# Allegro board BINARYCOUNTER.brd
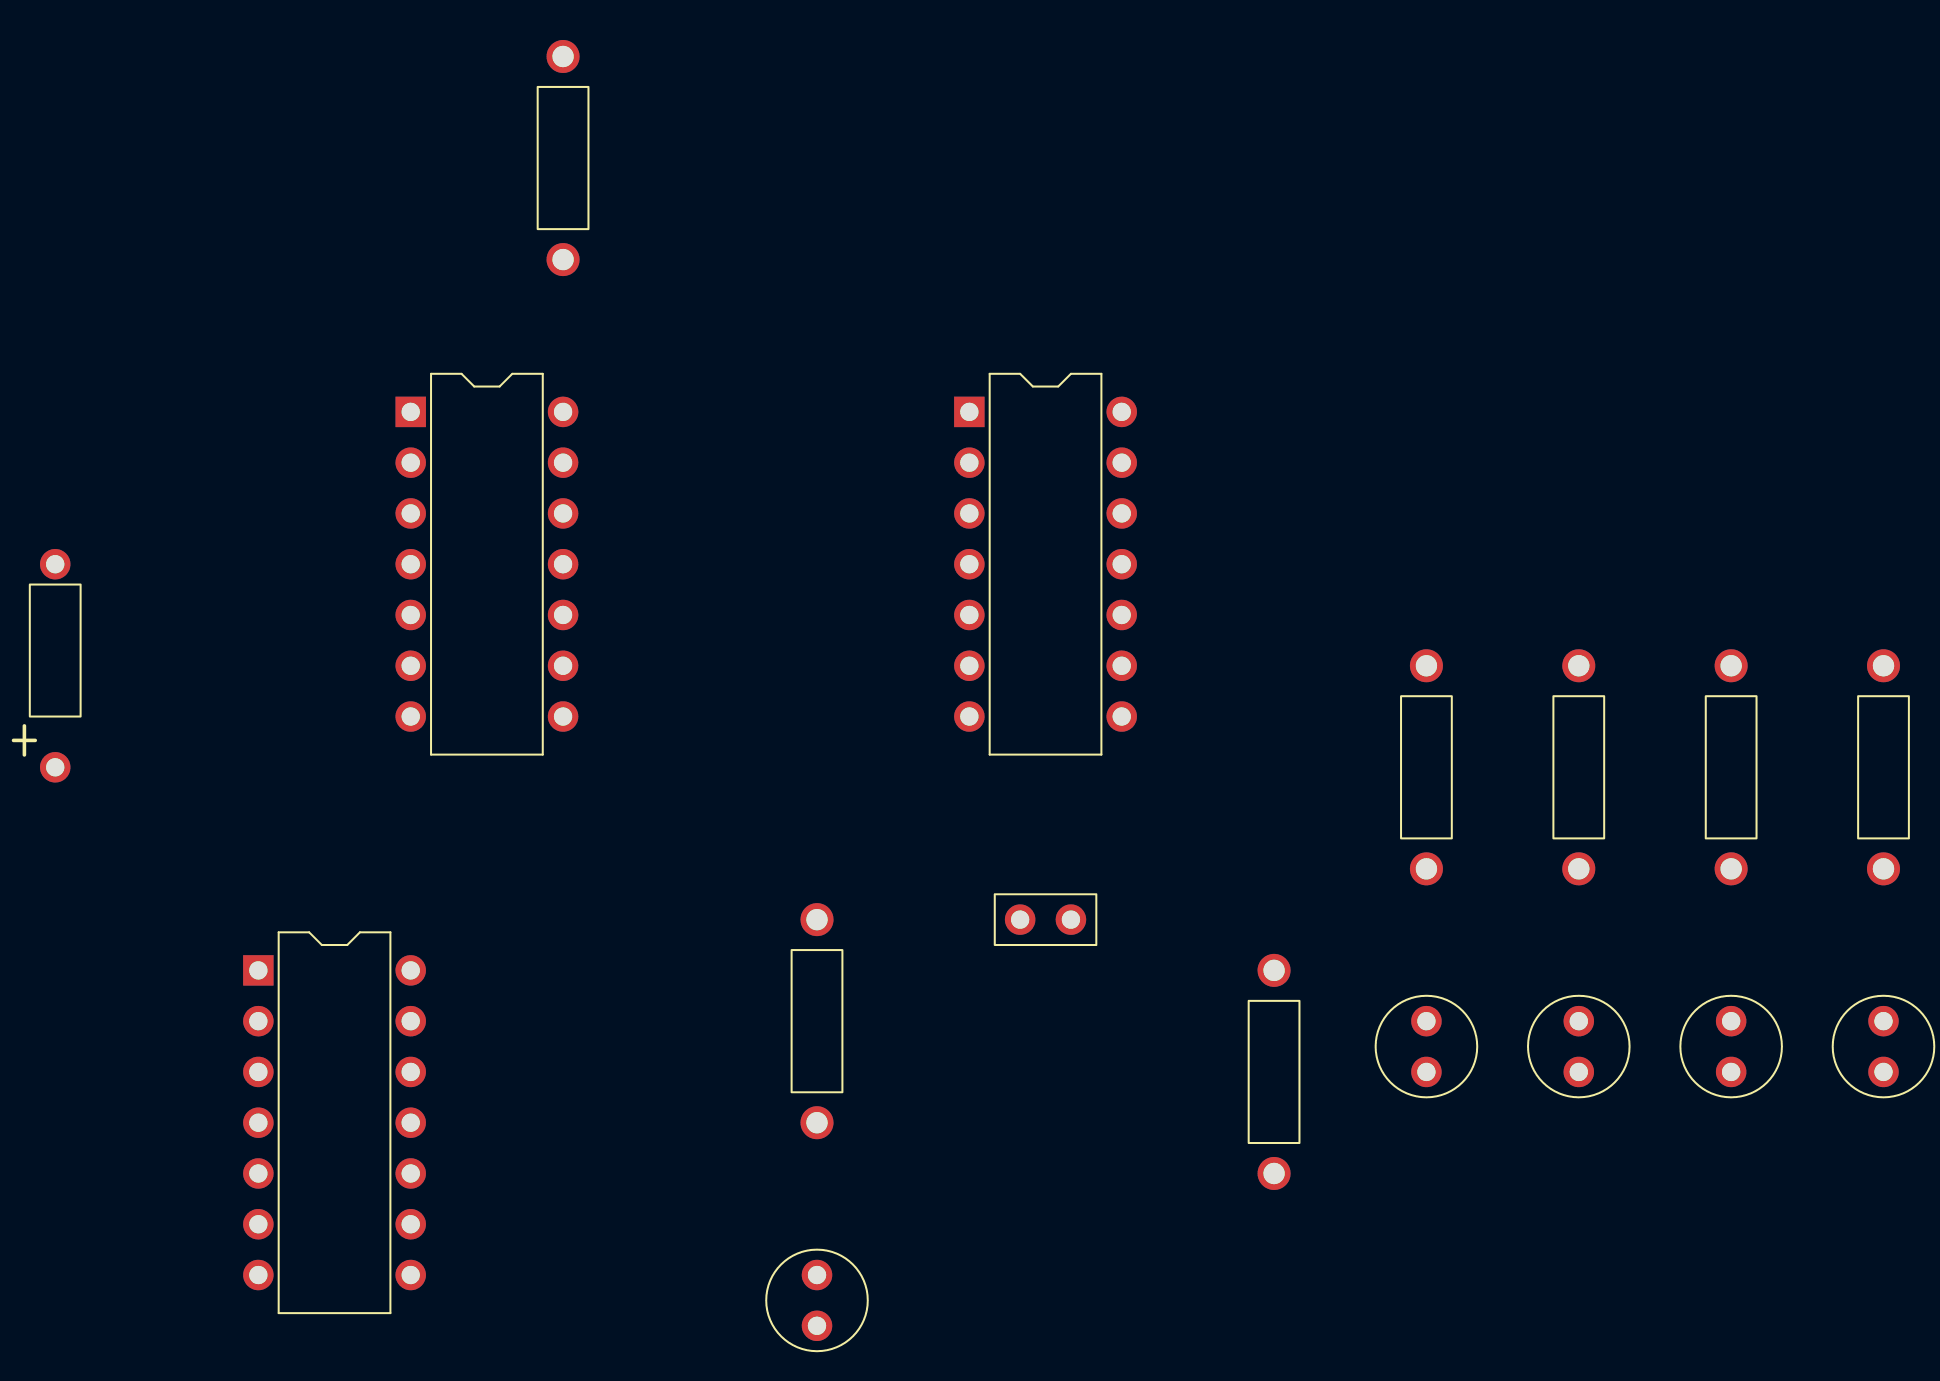
[diagram p0: board, top side]
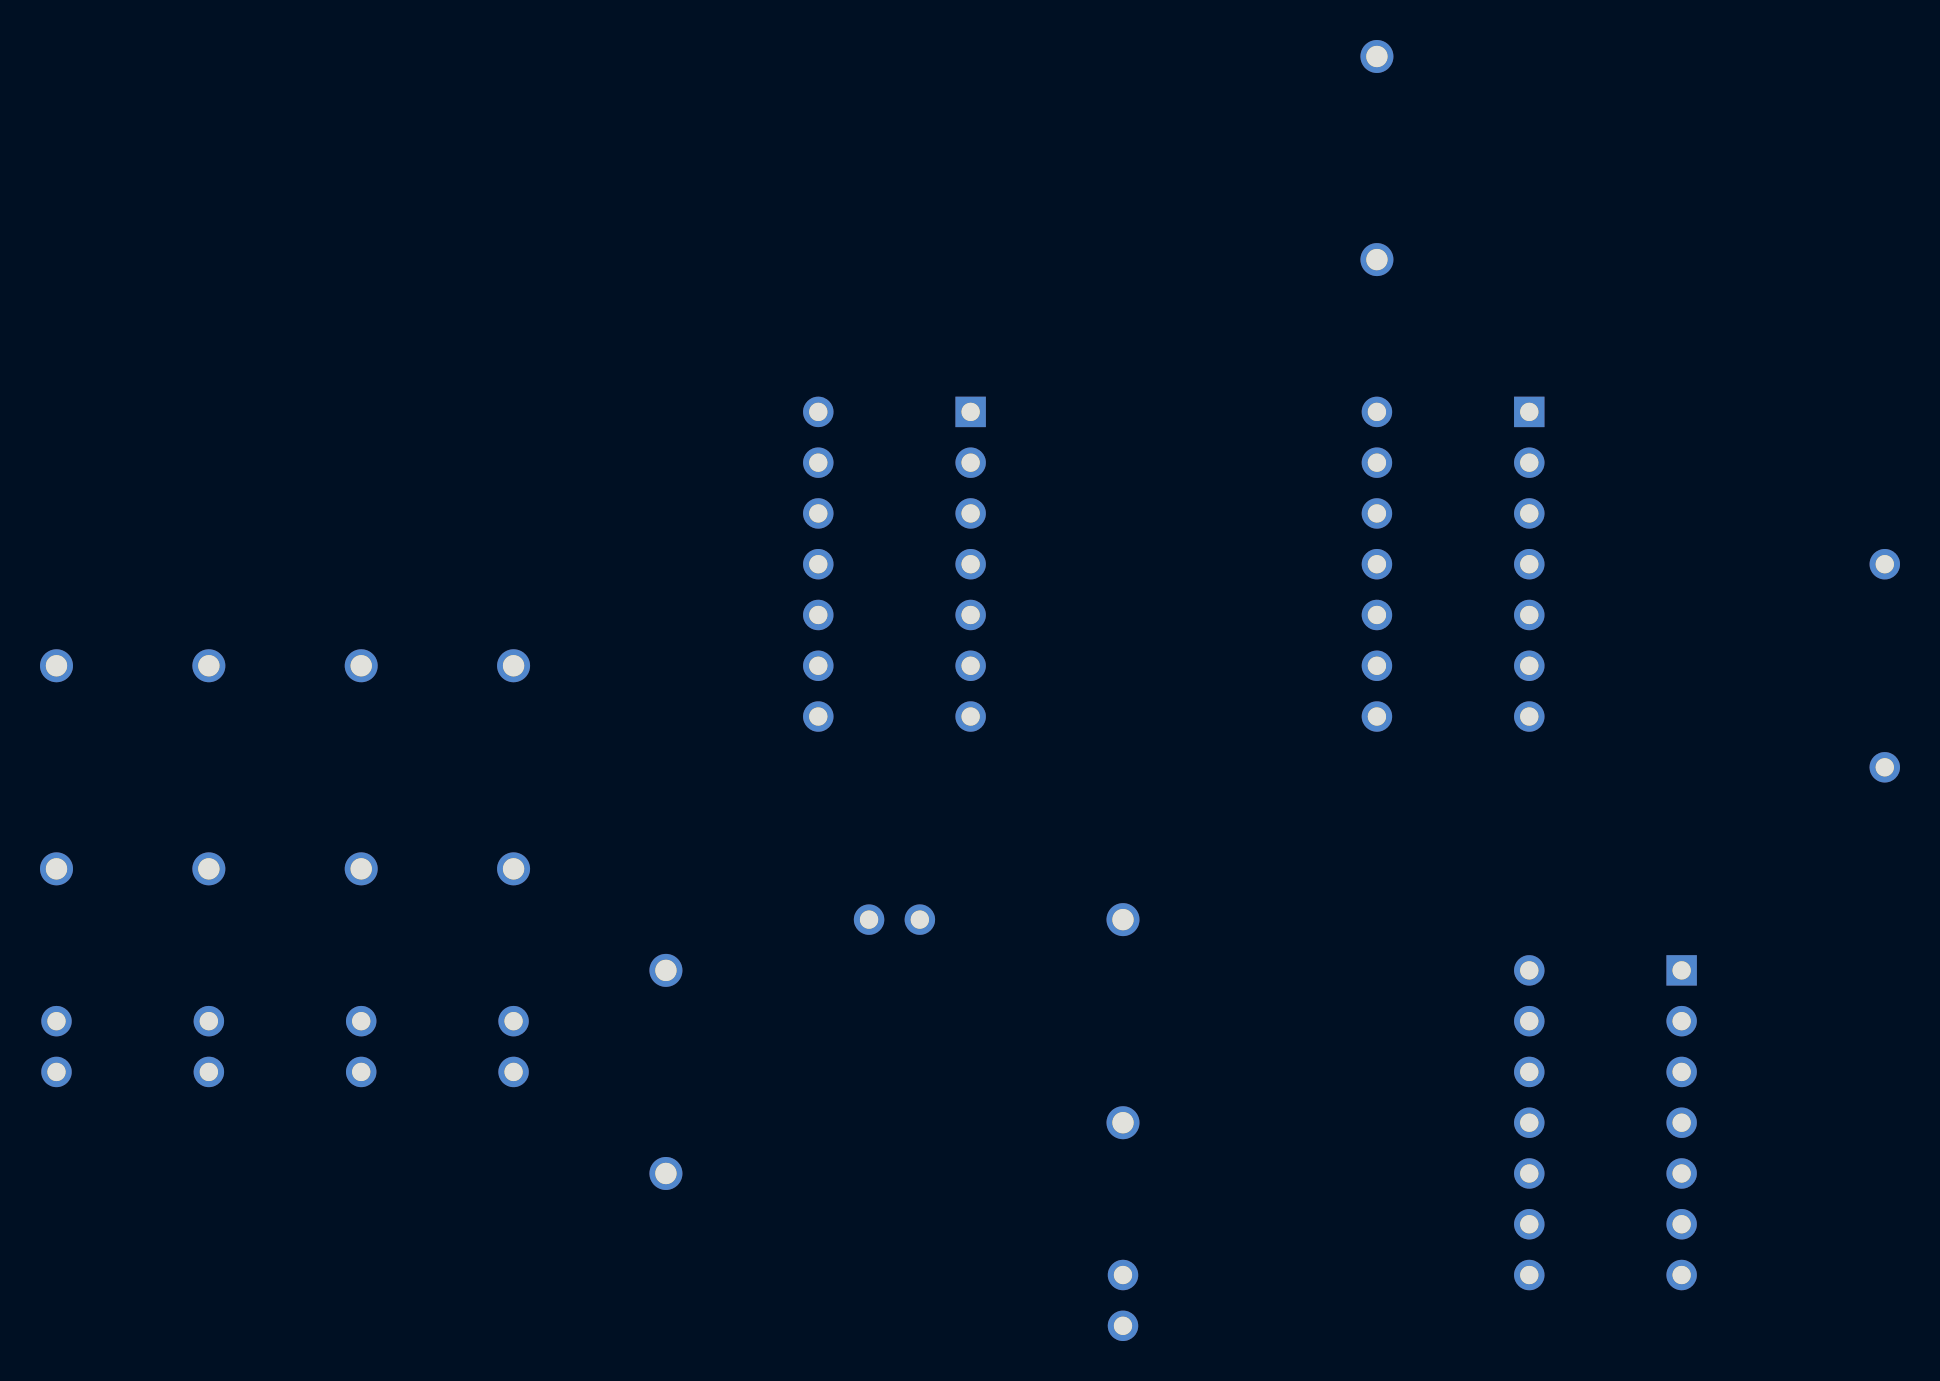
[diagram p1: board, bottom side, seen from below]

No outline. copper layers: TOP, BOTTOM. Coordinates in mm from the lowest, leftmost part position.

## Placement (name value [footprint] x y rotation side)
C1  100u  [CAP400]  0 27.94 0 top
D1  LED  [CAP196]  38.1 0 0 top
D2  LED  [CAP196]  68.58 12.7 0 top
D3  LED  [CAP196]  76.2 12.7 0 top
D4  LED  [CAP196]  83.82 12.7 0 top
D5  LED  [CAP196]  91.44 12.7 0 top
R1  30k  [RES400]  25.4 53.34 0 top
R2  200  [RES400]  38.1 10.16 0 top
R3  200  [RES400]  83.82 22.86 0 top
R4  200  [RES400]  60.96 7.62 0 top
R5  200  [RES400]  68.58 22.86 0 top
R6  200  [RES400]  76.2 22.86 0 top
R7  200  [RES400]  91.44 22.86 0 top
SW1  SW SPST  [JUMPER2]  48.26 20.32 0 top
U1  74HC14  [DIP14_3]  17.78 45.72 0 top
U2  74HC14  [DIP14_3]  45.72 45.72 0 top
U3  74HC93  [DIP14_3]  10.16 17.78 0 top

## Library data of the parts
C1 = CAP: Tolerance: ***; User Part Number: ***
D1-D5 = LED: Tolerance: ***; User Part Number: ***
R1-R7 = R: Tolerance: ***; User Part Number: ***
SW1 = SW SPST_1: User Part Number: ***
U1 = 74HC14: Tolerance: ***; User Part Number: ***
U2 = 74HC14_1: Tolerance: ***; User Part Number: ***
U3 = 74HC93_8: Tolerance: ***; User Part Number: ***

## Footprints (pads in the part's own frame, mm; a bottom-side part is the same pattern mirrored in y, then rotated)
CAP196
  round 1.524 hole 0.914: 1(0,0) 2(0,2.54)
CAP400
  round 1.524 hole 0.914: 1(0,0) 2(0,10.16)
DIP14_3
  rect 1.524x1.524 hole 0.914: 1(0,0)
  round 1.524 hole 0.914: 2(0,-2.54) 3(0,-5.08) 4(0,-7.62) 5(0,-10.16) 6(0,-12.7) 7(0,-15.24) 8(7.62,-15.24) 9(7.62,-12.7) 10(7.62,-10.16) 11(7.62,-7.62) 12(7.62,-5.08) 13(7.62,-2.54) 14(7.62,0)
JUMPER2
  round 1.524 hole 0.914: 1(0,0) 2(2.54,0)
RES400
  round 1.651 hole 1.067: 1(0,0) 2(0,10.16)

## Nets
GND: C1.2 D1.1(CATHODE) D2.1(CATHODE) D3.1(CATHODE) D4.1(CATHODE) D5.1(CATHODE) R4.1 U1.7 U2.7 U3.10
VCC: SW1.1 U1.14 U2.14 U3.2(R01) U3.5
N00195: D1.2(ANODE) R2.1
N00235: D2.2(ANODE) R5.1
N00273: D3.2(ANODE) R6.1
N00311: D4.2(ANODE) R3.1
N00349: D5.2(ANODE) R7.1
N00426: C1.1 R1.1 U1.1(A)
N00444: R1.2 U1.2(Y) U2.1(A)
N00472: R2.2 U2.2(Y) U3.14(C\L\K\A\)
N00631: R7.2 U3.1(C\L\K\B\) U3.12(QA)
N00638: R3.2 U3.9(QB)
N00645: R6.2 U3.8(QC)
N00652: R5.2 U3.11(QD)
N01422: R4.2 SW1.2 U3.3(R02)

Pads without a net: U1 3 4 5 6 8 9 10 11 12 13; U2 3 4 5 6 8 9 10 11 12 13; U3 4 6 7 13
